# Altium PCB Power Sense Module PCB.PcbDoc
Units mm, origin at the board's own origin, x right, y up, seen from the top; angles counter-clockwise.
Board outline 45 x 44.5 mm, 2 copper layers (Top Layer, Bottom Layer); 23 components, 16 nets, 78 pads, 9 vias.
Unrouted connection lines stored in the file: 1.
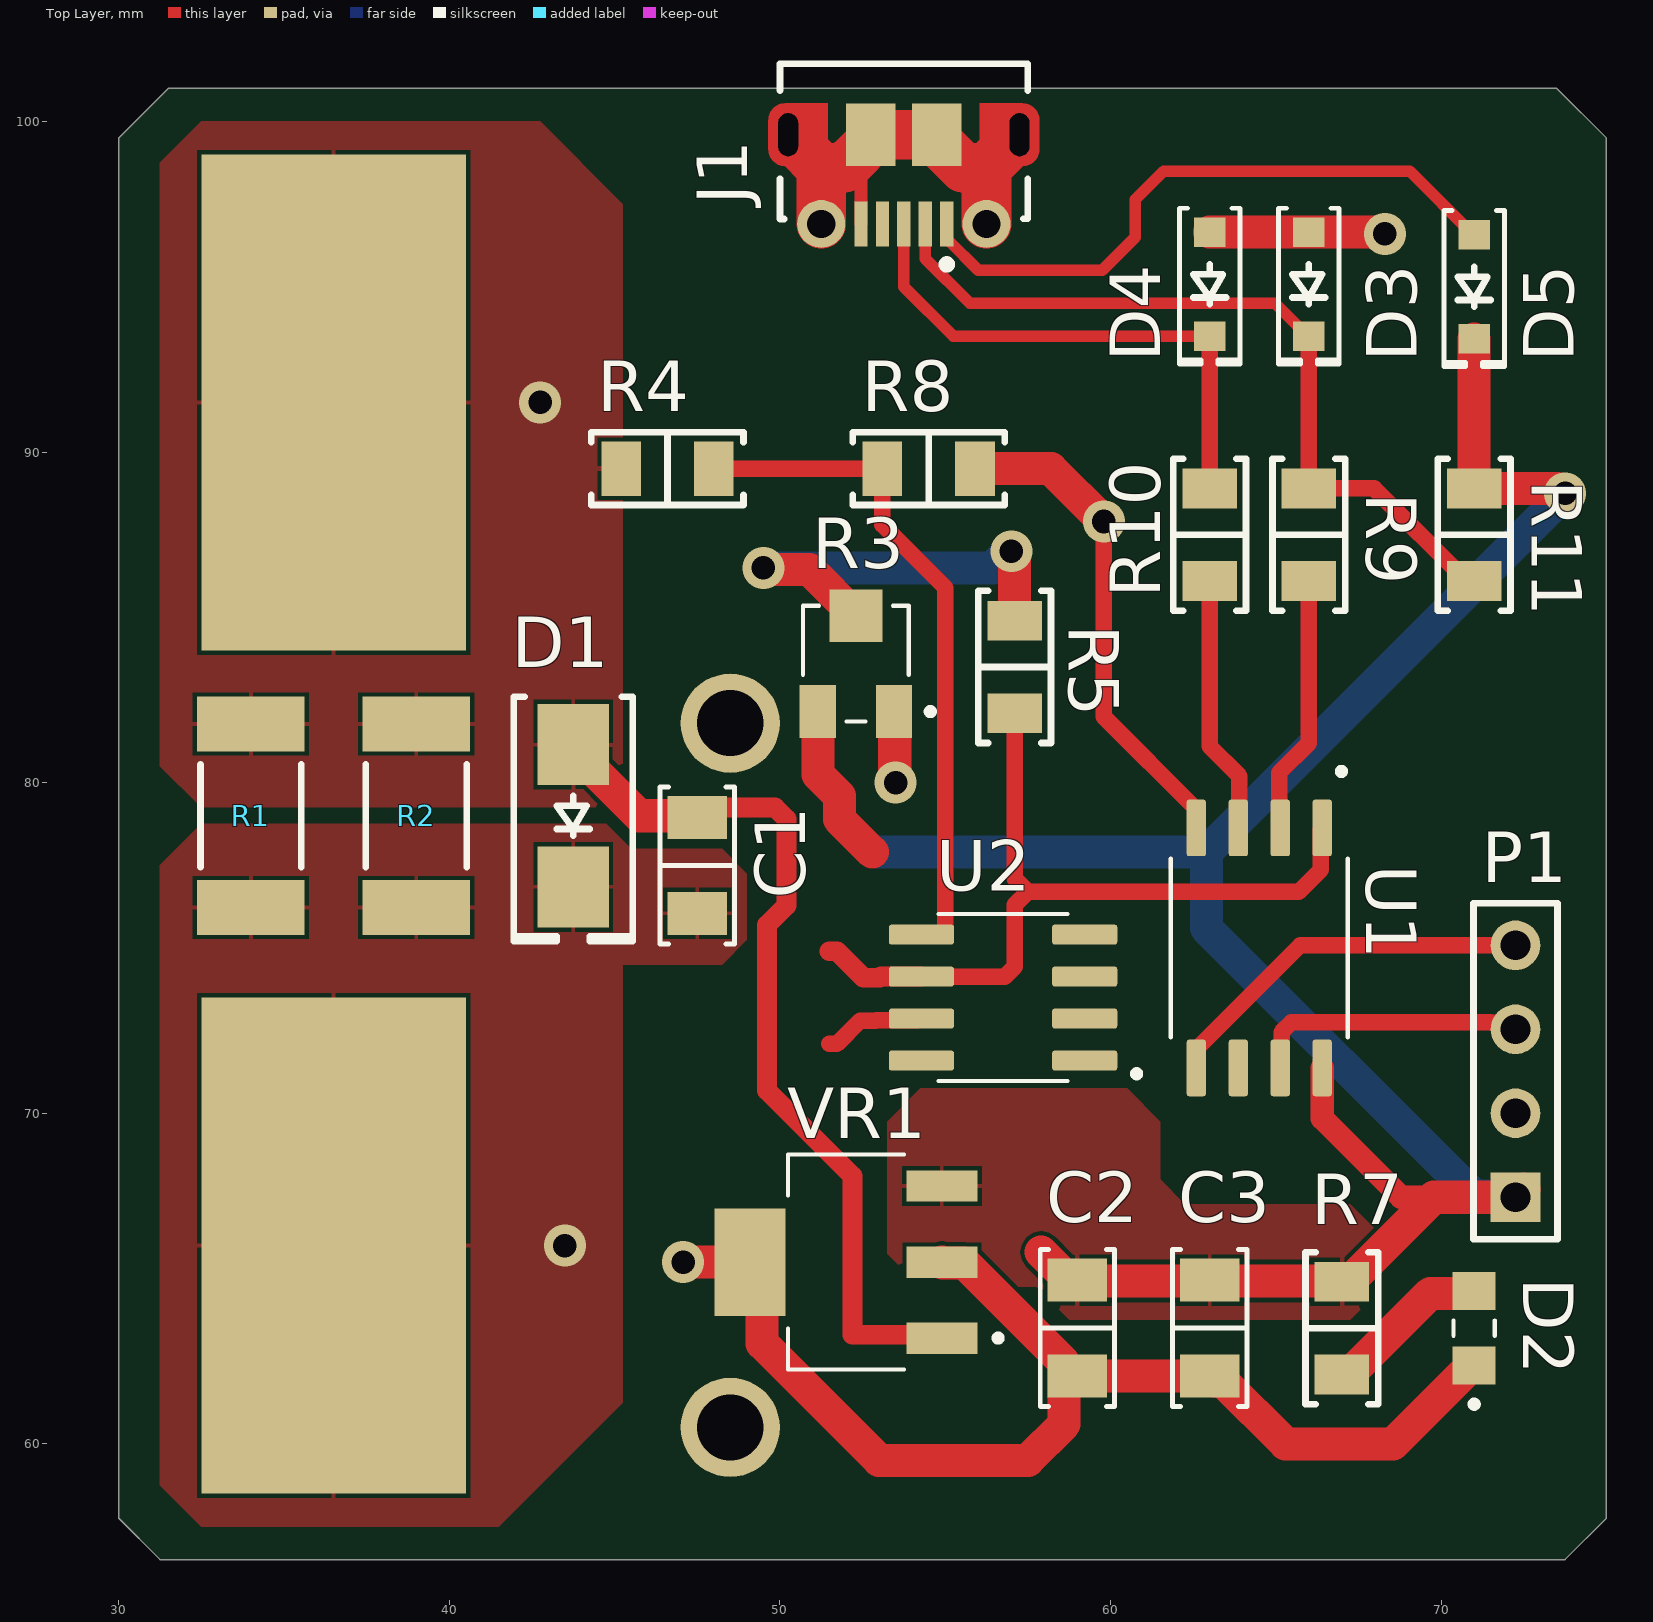
[diagram p0: Top Layer view]
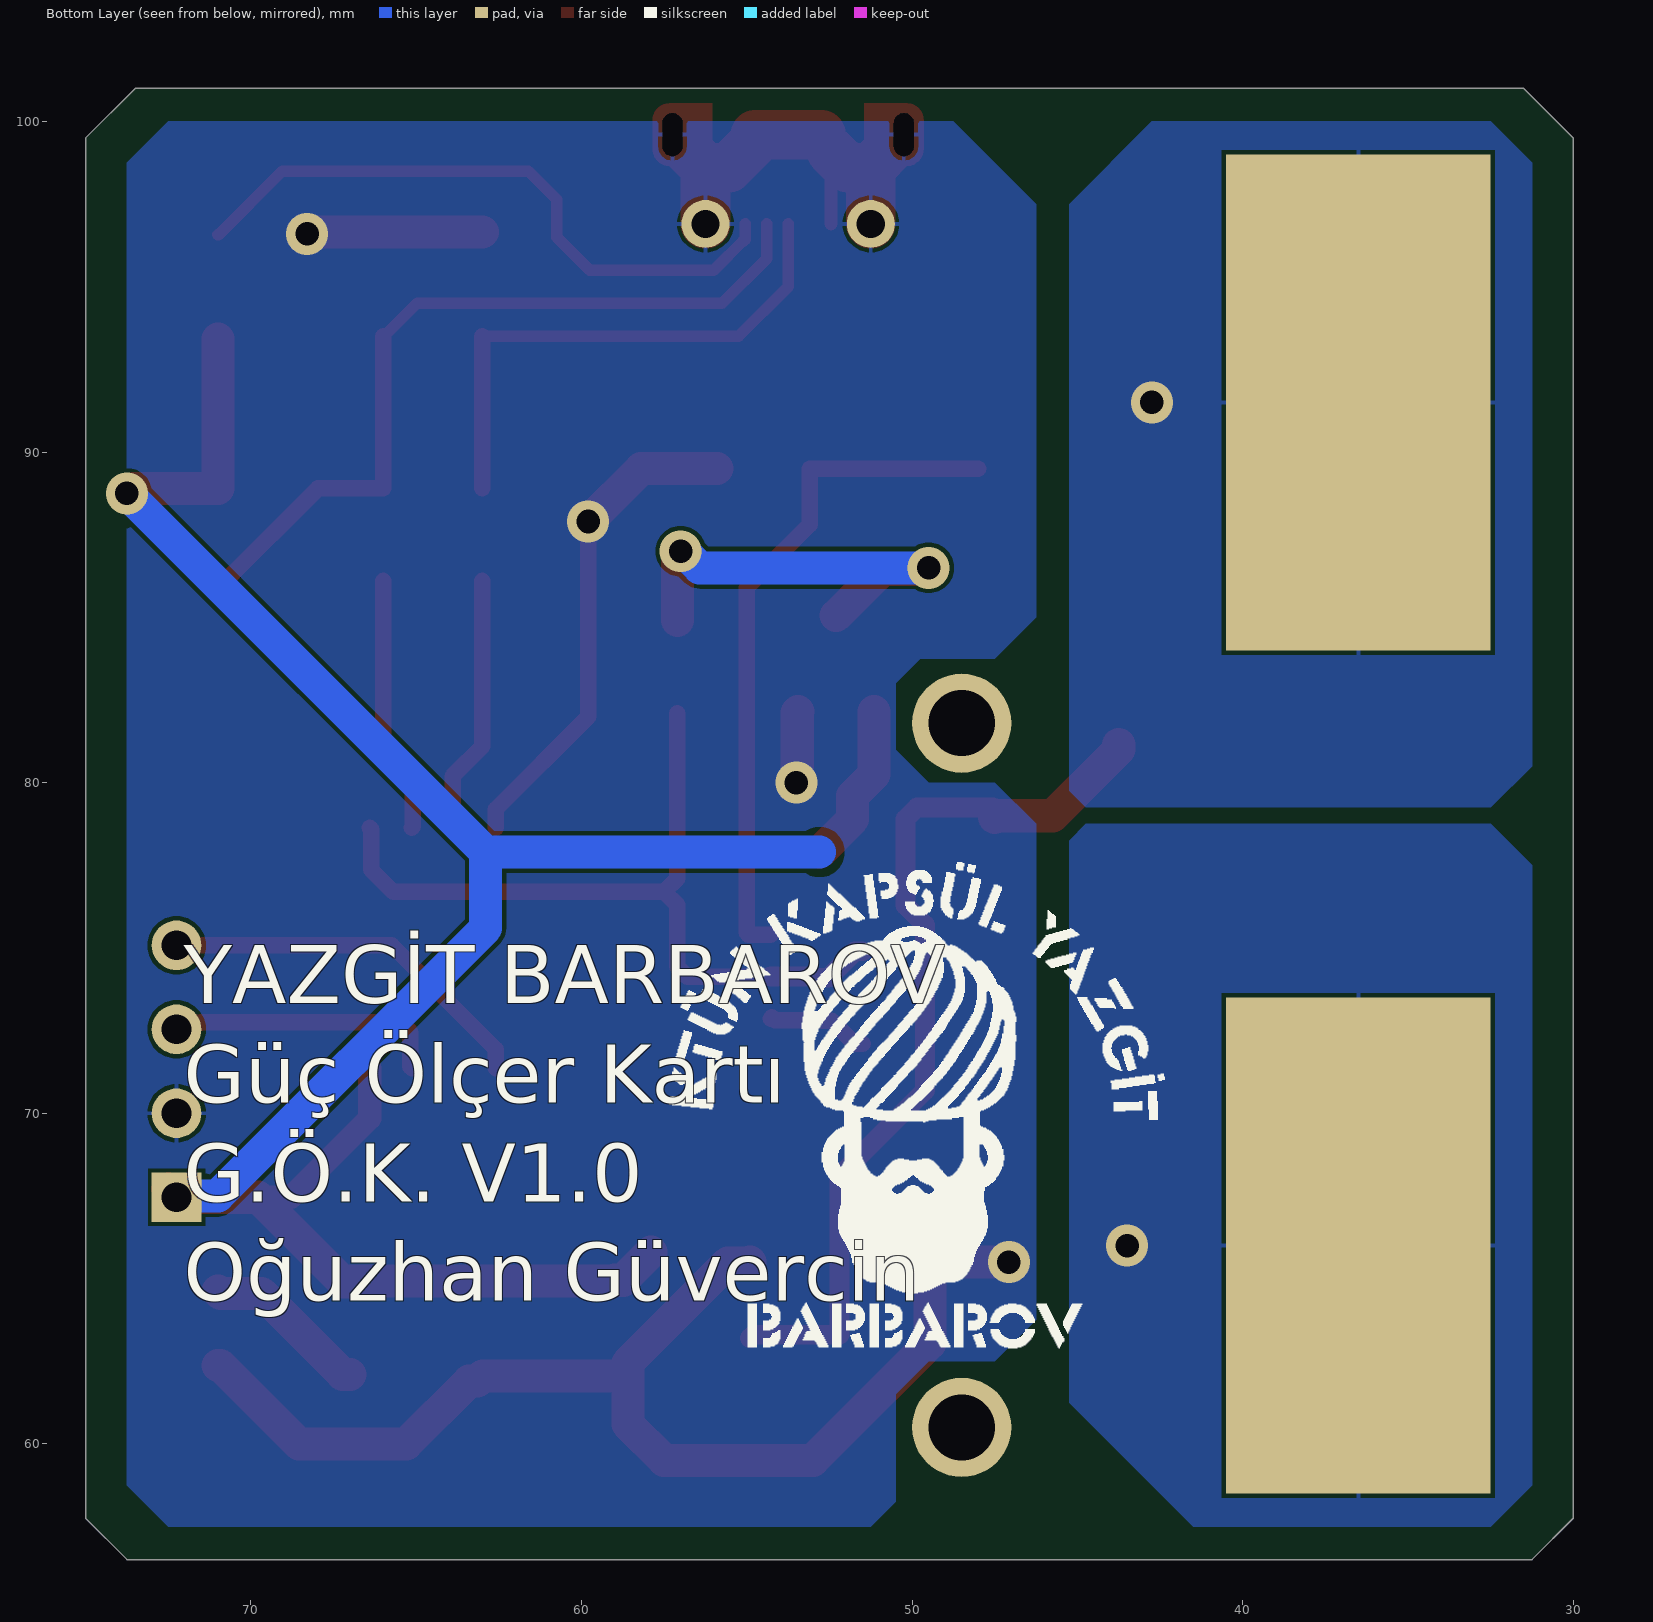
[diagram p1: Bottom Layer view, seen from below]
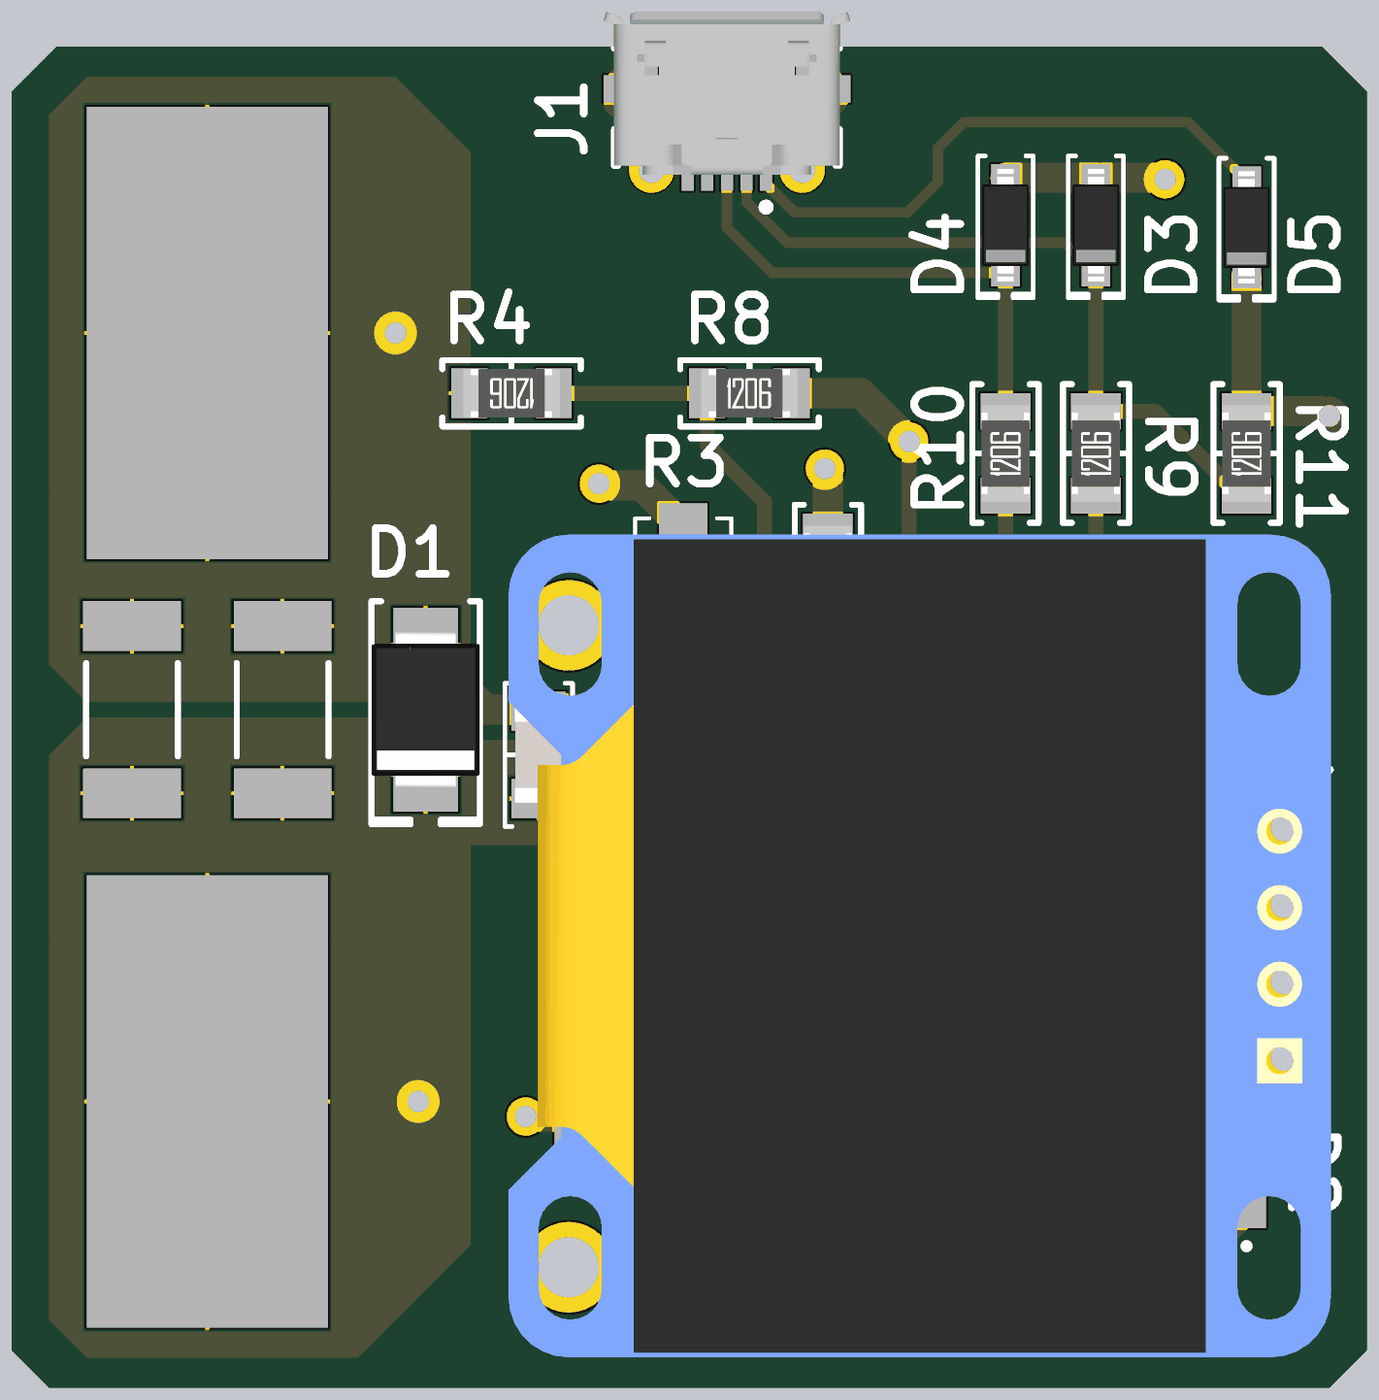
[diagram p2: 3D render of the assembled board from above, using the file's embedded part models]

## Layer stack, top to bottom
Top Solder: solder mask 0.0102, Solder Resist, Dk 3.5
Top Layer: signal copper 0.0356
Dielectric 1: dielectric 0.32, FR-4, Dk 4.8
Bottom Layer: signal copper 0.0356
Bottom Solder: solder mask 0.0102, Solder Resist, Dk 3.5

## Board outline
31.25,56.5 30,57.75 30,99.5 31.5,101 73.5,101 75,99.5 75,57.75 73.75,56.5

## Design rules (kind name [scope] priority, off if disabled: settings)
BoardOutlineClearance [All] p1: gap=0.2 ignorepadtopadclearanceinfootprint=FALSE
Clearance [All] p1: gap=0.127 ignorepadtopadclearanceinfootprint=FALSE except(0.25: Arc-Hole Track-Hole SMDPad-Hole THPad-Hole Via-Hole Fill-Hole Poly-Hole Region-Hole Text-Hole)
ComponentClearance [All] p1: gap=0.127 collisioncheckmode=3 verticalgap=0.127 showdistances=TRUE
DiffPairsRouting [All] p1: maxlimit=0.254 minlimit=0.127 mostfreqgap=0.127 toplayer_minwidth=0.127 toplayer_maxwidth=25.4 toplayer_prefwidth=0.127 bottomlayer_minwidth=0.127 bottomlayer_maxwidth=25.4 bottomlayer_prefwidth=0.127 maxuncoupledlength=12.7
Height [All] p1: minheight=0 maxheight=1816.048 prefheight=12.7
HoleSize [All] p1: absolutevalues=TRUE maxlimit=6.3 minlimit=0.3 maxpercent=80.000 minpercent=20.000
HoleToHoleClearance [All] p1: gap=0.25 allowstackedmicrovias=FALSE
MinimumAnnularRing [All] p1: minimumring=0.076
MinimumSolderMaskSliver [All] p1: minsoldermaskwidth=0
PlaneClearance [All] p1: clearance=0.127
PlaneConnect PlaneConnectPowerPads [InPadClass('PowerPads')] p1: planeconnectstyle=Direct reliefexpansion=0.508 reliefentries=4 reliefconductorwidth=0.254 reliefairgap=0.254
PlaneConnect [All] p2: pad.planeconnectstyle=Relief pad.reliefexpansion=0.3 pad.reliefentries=4 pad.reliefconductorwidth=0.127 pad.reliefairgap=0.127 via.planeconnectstyle=Direct via.reliefexpansion=0.3 via.reliefentries=4 via.reliefconductorwidth=0.127 via.reliefairgap=0.127
PolygonConnect PolygonConnectPowerPads [All vs (InPadClass('PowerPads'))] p1: connectstyle=Direct reliefconductorwidth=0.254 reliefentries=4 polygonreliefangle="90 Angle" airgapwidth=0.254
PolygonConnect [All] p2: thpad.connectstyle=Relief thpad.reliefconductorwidth=0.127 thpad.reliefentries=4 thpad.polygonreliefangle="90 Angle" thpad.airgapwidth=0.127 smdpad.connectstyle=Relief smdpad.reliefconductorwidth=0.127 smdpad.reliefentries=4 smdpad.polygonreliefangle="90 Angle" smdpad.airgapwidth=0.127 via.connectstyle=Direct via.reliefconductorwidth=0.127 via.reliefentries=4 via.polygonreliefangle="90 Angle" via.airgapwidth=0.127
RoutingVias [All] p1: holewidth=0.3 width=0.6 viastyle="Through Hole" minholewidth=0.3 minwidth=0.6 maxholewidth=0.6 maxwidth=6.6
SilkToSilkClearance [All] p1: silktosilkclearance=0
SilkToSolderMaskClearance [IsPad] p1: minsilkscreentomaskgap=0.127 clearancetoexposedcopper=TRUE
SolderMaskExpansion [All] p1: expansion=0.075 istentingtop=FALSE
Width [All] p1: maxlimit=25.4 minlimit=0.127 preferedwidth=0.127 minimp=50.000000 maximp=50.000000 favimp=50.000000
20 further rules are at their usual default settings.

## Components (designator, comment, footprint, x,y, rotation, side; value= is the part's Value field where it differs from the comment)
C1 "1µF" "CAP 1206_3216 - 0.8MM" 47.5,77.5 r90 top
C2 "4.7µF" "CAP 1206_3216 - 1.0MM" 59,63.5 r90 top
C3 "0.1µF" "CAP 1206_3216 - 0.8MM" 63,63.5 r90 top
D1 "RS1AB-13-F" "DO214AA SMB" 43.75,79 r270 top
D2 "7012X1" LED_7012X1 71,63.5 r90 top
D3 "BZT52C36-E3-18" SOD-123 66,95.075 r270 top
D4 "BZT52C36-E3-18" SOD-123 63,95.075 r270 top
D5 "1N5819HW-7-F" SOD-123 71,95 r270 top
J1 "105017-0001" USB-MICRO-B_V 53.75,98.25 r180 top
P1 "OLED I2C" "OLED I2C" 72.25,67.46 r90 top locked
R1 "Shunt Resistor" RESC6430X04N 34,79 r90 top
R2 "Shunt Resistor" RESC6430X04N 39,79 r90 top
R3 "3313J-1-202G" TRIM_3313J-1-202G 52.3,83.6 r0 top
R4 "10 kOhms" "RES 1206_3216" 46.6,89.5 r180 top
R5 "10 kOhms" "RES 1206_3216" 57.1,83.5 r270 top
R7 "1 kOhms" "RES 1206_3216" 67,63.5 r90 top
R8 "100 kOhms" "RES 1206_3216" 54.5,89.5 r0 top
R9 "66.5 Ohms" "RES 1206_3216" 66,87.5 r90 top
R10 "66.5 Ohms" "RES 1206_3216" 63,87.5 r90 top
R11 "1.5 kOhms" "RES 1206_3216" 71,87.5 r90 top
U1 "ATTINY85V-10SU" SOIC127P798X216-8N 64.5,75 r270 top
U2 "LM358D" SOIC127P599X175-8N 56.75,73.5 r180 top
VR1 "LM7805MPX/NOPB" VREG_LM7805MPX/NOPB 52,65.5 r180 top

## Footprints (in the part's own frame and the unit in brackets; to place one, negate y for a bottom-side part, rotate by r counter-clockwise, add the part's x,y. Pads: shape width x height; smd on the part's side, far side on the other; paste and mask are expansions set on the pad)
"CAP 1206_3216 - 0.8MM" [mm] "Chip Capacitor, 2-Leads, Body 3.25x1.60mm, IPC Medium Density"
  rect 1.3x1.8 smd: 1(-1.45,0) 2(1.45,0)
  silkscreen extent -2.37,-1.12 2.37,1.12, body extent -1.6,-0.8 1.6,0.8, height 0.8
"CAP 1206_3216 - 1.0MM" [mm] "Chip Capacitor, 2-Leads, Body 3.25x1.60mm, IPC Medium Density"
  rect 1.3x1.8 smd: 1(-1.45,0) 2(1.45,0)
  silkscreen extent -2.37,-1.12 2.37,1.12, body extent -1.6,-0.8 1.6,0.8, height 1
"DO214AA SMB" [mm] "Molded Diode, 2-Leads, Body 4.31x3.62mm, IPC Medium Density"
  rect 2.45x2.15 smd: 1(-2.15,0) 2(2.15,0)
  silkscreen extent -3.6,-1.8 3.8,1.8, body extent -2.6,-1.8 2.6,1.8, height 2.4
LED_7012X1 [mm]
  rect 1.15x1.3 smd: A(1.125,0) C(-1.125,0)
  silkscreen extent -2.4,-0.63 0.23,0.63
"OLED I2C" [mm] "Connector; Header; 4 Position"
  rect 1.5x1.5 hole 0.9: 1(0,0)
  round 1.5 hole 0.9: 2(2.54,0) 3(5.08,0) 4(7.62,0)
  silkscreen extent -1.27,-1.27 8.89,1.27, body extent -9.95,-1.55 17.35,25.75, height 8.99
"RES 1206_3216" [mm] "Chip Resistor, 2-Leads, Body 3.13x1.55mm, IPC Medium Density"
  rect 1.2x1.65 smd: 1(-1.4,0) 2(1.4,0)
  silkscreen extent -2.3,-1.1 2.3,1.1, body extent -1.6,-0.8 1.6,0.8, height 0.6
RESC6430X04N [mm] "Chip Resistor, 2-Leads, Body 6,35x3,05mm, IPC Medium Density"
  rect 1.65x3.25 smd: 1(-2.775,0) 2(2.775,0)
  silkscreen extent -1.55,-1.52 1.55,1.53, body extent -3.25,-1.63 3.25,1.63, height 0.38
SOD-123 [mm] "SOD, 2-Leads, Body 1.55x3.70mm, IPC Medium Density"
  rect 0.9x0.95 smd: 1(-1.575,0) 2(1.575,0)
  silkscreen extent -2.3,-0.92 2.41,0.92, body extent -1.86,-0.78 1.86,0.77, height 1.35
SOIC127P599X175-8N [mm]
  rrect25% 1.97x0.6 smd: 1(-2.47,1.905) 2(-2.47,0.635) 3(-2.47,-0.635) 4(-2.47,-1.905) 5(2.47,-1.905) 6(2.47,-0.635) 7(2.47,0.635) 8(2.47,1.905)
  silkscreen extent -4.14,-2.52 1.95,2.52
SOIC127P798X216-8N [mm]
  rrect25% 1.71x0.58 smd: 1(-3.63,1.905) 2(-3.63,0.635) 3(-3.63,-0.635) 4(-3.63,-1.905) 5(3.63,-1.905) 6(3.63,-0.635) 7(3.63,0.635) 8(3.63,1.905)
  silkscreen extent -5.44,-2.68 2.7,2.68
TRIM_3313J-1-202G [mm]
  rect 1.1x1.6 smd: 1(1.15,-1.45) 3(-1.15,-1.45)
  rect 1.6x1.6 smd: 2(0,1.45)
  silkscreen extent -1.6,-1.75 2.35,1.75
USB-MICRO-B_V [mm] "USB, MICRO B, Body 7.491x4.695 mm, Pitch 0.65 mm"
  rect 0.4x1.35 smd: 1(-1.3,1.35) 2(-0.65,1.35) 3(0,1.35) 4(0.65,1.35) 5(1.3,1.35)
  round 1.45 hole 0.85: 6(-2.5,1.35) 7(2.5,1.35)
  rrect50% 0x0 hole 0.6 slot 1.3 at 90 deg: 8(-3.5,-1.35) 11(3.5,-1.35)
  rect 1.5x1.9 smd: 9(-1,-1.35) 10(1,-1.35)
  Top Layer circle w0.5: c-3.6,-1.8 r0.25
  Top Layer circle w0.5: c-3.6,-0.9 r0.25
  Top Layer circle w0.5: c3.6,-1.8 r0.25
  Top Layer region: -3.6,-1.8 -3.6,-0.9 -4.1,-0.9 -4.1,-1.8
  Top Layer region: 3.6,-0.9 3.6,-1.8 4.1,-1.8 4.1,-0.9
  Top Layer region: 2.3,-0.4 2.3,-2.3 3.6,-2.3 3.6,-0.4
  Top Layer region: -2.3,-2.3 -2.3,-0.4 -3.6,-0.4 -3.6,-2.3
  Top Layer lines w0.5: 3.5,-0.671 ccw(c3.6,-0.9) 3.35,-0.9 ccw(c3.6,-0.9) 3.5,-1.129 ccw(c3.6,-0.9) 3.5,-0.671
  silkscreen extent -3.75,-3.5 3.75,2.7, body extent -4.1,-3.9 4.1,1.5, height 2.67
VREG_LM7805MPX/NOPB [mm]
  rect 2.15x0.95 smd: 1(-2.9,2.3) 2(-2.9,0) 3(-2.9,-2.3)
  rect 2.15x3.25 smd: 4(2.9,0)
  silkscreen extent -4.7,-3.25 1.75,3.25, body extent -3.63,-3.25 3.37,3.25, height 1.71

## Part data
C1: library part AC1206KKX7R8BB105, "CAP CER 1UF 25V X7R 1206", Device Package="1206 (3216 Metric)", Manufacturer=Yageo, Operating Temperature="-55°C ~ 125°C", Ratings=AEC-Q200, Supplier Part Number 1=311-3039-1-ND, Temperature Coefficient=X7R, Tolerance=±10%, Voltage - Rated=25V, Applications=Automotive, Capacitance=1µF, ComponentLink1Description=Datasheet, ComponentLink1URL=http://www.yageo.com/documents/recent/UPY-AC_NP0X7R_16V-to-630V_12.pdf, ComponentLink2Description="DigiKey Link", ComponentLink2URL=http://digikey.com/product-detail/en/yageo/AC1206KKX7R8BB105/311-3039-1-ND/6643290, LastUpdated="2.09.2020 01:04:45", Lifecycle Status=Active, Minimum Order=1, Mounting Type="Surface Mount, MLCC", Package / Case="1206 (3216 Metric)", Packaging=TapeAndReel, Part Number=AC1206KKX7R8BB105, Part Status=Active, PartId=18820, Price=0.22, Series=AC, Size / Dimension="0.126\" L x 0.063\" W (3.20mm x 1.60mm)", Supplier 1=DigiKey, Thickness (Max)="0.028\" (0.70mm)"
C2: library part UMK316ABJ475KD-T, "CAP CER 4.7UF 50V X5R 1206", Device Package="1206 (3216 Metric)", Manufacturer="Taiyo Yuden", Operating Temperature="-55°C ~ 85°C", Supplier Part Number 1=587-2988-1-ND, Temperature Coefficient=X5R, Tolerance=±10%, Voltage - Rated=50V, Applications="General Purpose", Capacitance=4.7µF, ComponentLink1Description=Datasheet, ComponentLink1URL=https://www.yuden.co.jp/productdata/catalog/mlcc01_e.pdf, ComponentLink2Description="DigiKey Link", ComponentLink2URL=http://digikey.com/product-detail/en/taiyo-yuden/UMK316ABJ475KD-T/587-2988-1-ND/2714181, LastUpdated="2.09.2020 01:05:06", Lifecycle Status=Active, Minimum Order=1, Mounting Type="Surface Mount, MLCC", Package / Case="1206 (3216 Metric)", Packaging=TapeAndReel, Part Number=UMK316ABJ475KD-T, Part Status=Active, PartId=18934, Price=0.12, Series=M, Size / Dimension="0.126\" L x 0.063\" W (3.20mm x 1.60mm)", Supplier 1=DigiKey, Thickness (Max)="0.037\" (0.95mm)"
C3: library part CC1206MRY5V9BB104, "CAP CER 0.1UF 50V Y5V 1206", Device Package="1206 (3216 Metric)", Manufacturer=Yageo, Operating Temperature="-30°C ~ 85°C", Supplier Part Number 1=311-4504-1-ND, Temperature Coefficient="Y5V (F)", Tolerance=±20%, Voltage - Rated=50V, Applications="General Purpose", Capacitance=0.1µF, ComponentLink1Description=Datasheet, ComponentLink1URL=http://www.yageo.com/documents/recent/UPY-GPHC_Y5V_6.3V-to-50V_8.pdf, ComponentLink2Description="DigiKey Link", ComponentLink2URL=http://digikey.com/product-detail/en/yageo/CC1206MRY5V9BB104/311-4504-1-ND/8025593, LastUpdated="2.09.2020 01:04:46", Lifecycle Status=Active, Minimum Order=1, Mounting Type="Surface Mount, MLCC", Package / Case="1206 (3216 Metric)", Packaging=TapeAndReel, Part Number=CC1206MRY5V9BB104, Part Status=Active, PartId=18711, Price=0.06, Series=CC, Size / Dimension="0.126\" L x 0.063\" W (3.20mm x 1.60mm)", Supplier 1=DigiKey, Thickness (Max)="0.028\" (0.70mm)"
D1: "DIODE GEN PURP 50V 1A SMB", Capacitance @ Vr, F="15pF @ 4V, 1MHz", Current - Average Rectified (Io)=1A, Current - Reverse Leakage @ Vr="5µA @ 50V", Manufacturer="Diodes Incorporated", Operating Temperature - Junction="-65°C ~ 150°C", Package / Case="DO-214AA, SMB", Supplier Device Package=SMB, Supplier Part Number 1=RS1AB-FDICT-ND, Voltage - DC Reverse (Vr) (Max)=50V, Voltage - Forward (Vf) (Max) @ If="1.3V @ 1A", ComponentLink1Description=Datasheet, ComponentLink1URL=https://www.diodes.com/assets/Datasheets/ds15002.pdf, ComponentLink2Description="DigiKey Link", ComponentLink2URL=http://digikey.com/product-detail/en/diodes-incorporated/RS1AB-13-F/RS1AB-FDICT-ND/815907, Diode Type=Standard, LastUpdated="2.09.2020 01:18:53", Lifecycle Status=Active, Minimum Order=1, Mounting Type="Surface Mount", Packaging=TapeAndReel, Part Number=RS1AB-13-F, Part Status=Active, PartId=27, Price=0.09, Reverse Recovery Time (trr)=150ns, Series=-, Speed="Fast Recovery =< 500ns, > 200mA (Io)", Supplier 1=DigiKey
D2: "Red LED Indication - Discrete 1.7V 0805 (2012 Metric)", Package=None, Availability=Unavailable, MP=7012X1, Price=None
D3 D4: "DIODE ZENER 36V 410MW SOD123", Current - Reverse Leakage @ Vr="100nA @ 27V", Manufacturer="Vishay Semiconductor Diodes Division", Operating Temperature="-55°C ~ 150°C", Package / Case=SOD-123, Power - Max=410mW, Supplier Part Number 1=BZT52C36-E3-18GICT-ND, Tolerance=±5%, Voltage - Zener (Nom) (Vz)=36V, ComponentLink1Description=Datasheet, ComponentLink1URL=http://www.vishay.com/docs/85760/bzt52.pdf, ComponentLink2Description="DigiKey Link", ComponentLink2URL=http://digikey.com/product-detail/en/vishay-semiconductor-diodes-division/BZT52C36-E3-18/BZT52C36-E3-18GICT-ND/9600530, LastUpdated="2.09.2020 01:19:26", Lifecycle Status=Active, Minimum Order=1, Mounting Type="Surface Mount", Packaging=TapeAndReel, Part Number=BZT52C36-E3-18, Part Status=Active, PartId=1960, Price=0.03, Series=-, Supplier 1=DigiKey, Supplier Device Package=SOD-123, Impedance (Max) (Zzt)="40 Ohms"
D5: "DIODE SCHOTTKY 40V 1A SOD123", Capacitance @ Vr, F="60pF @ 4V, 1MHz", Current - Average Rectified (Io)=1A, Current - Reverse Leakage @ Vr="1mA @ 40V", Manufacturer="Diodes Incorporated", Operating Temperature - Junction="-65°C ~ 125°C", Package / Case=SOD-123, Supplier Part Number 1=1N5819HW-FDICT-ND, Voltage - DC Reverse (Vr) (Max)=40V, Voltage - Forward (Vf) (Max) @ If="450mV @ 1A", ComponentLink1Description=Datasheet, ComponentLink1URL=https://www.diodes.com/assets/Datasheets/ds30217.pdf, ComponentLink2Description="DigiKey Link", ComponentLink2URL=http://digikey.com/product-detail/en/diodes-incorporated/1N5819HW-7-F/1N5819HW-FDICT-ND/815283, Diode Type=Schottky, LastUpdated="2.09.2020 01:19:08", Lifecycle Status=Active, Minimum Order=1, Mounting Type="Surface Mount", Packaging=TapeAndReel, Part Number=1N5819HW-7-F, Part Status=Active, PartId=2212, Price=0.08, Series=-, Speed="Fast Recovery =< 500ns, > 200mA (Io)", Supplier 1=DigiKey, Supplier Device Package=SOD-123
J1: library part CMP-2000-05827-1, "Micro-USB B Receptacle, Right Angle, Bottom Mount, Surface Mount, with Solder Tabs, -30 to 85 degC, 5-Pin USB, RoHS, Tape and Reel", Manufacturer=Molex, Package Description="5-Leads USB, Micro B, Body 7.5 x 5 mm, Pitch 0.65 mm", Package Reference=MICRO-B, Package Version="Rev. F, 12/2012", Standard Package=1, Voltage - Max=30V, 3D Model=105017-0001.stp, Catalog Drawings=1050170001, Category=Connectors,Interconnects, Circuits=5, Connector Type=USB-microB, Datasheet URL=http://www.molex.com/elqNow/elqRedir.htm?ref=http://www.molex.com/webdocs/datasheets/pdf/en-us/1050170001_IO_CONNECTORS.pdf, Datasheet Version=03/2016, Family=USB,DVI,HDMIConnectors, Featured Product=Micro-USBConnectorsUSBConnectors, Features=Shielded,SolderRetention, Gender=Receptacle, Manufacturer URL=http://www.molex.com/, Mating Products=WM17145-ND-CABLEMICROUSBBTOSTDA1.0MWM17147-ND-CABLEMICROUSBBTOSTDA2.0MWM17146-ND-CABLEMICROUSBBTOSTDA1.5M, Mounting Technology=SurfaceMount, Mounting Type=BoardCutout,SurfaceMount,RightAngle, Number of Contacts=5, Online Catalog=Molex-MicroUSB, Other Names=WM1399DKR, Package URL=http://www.molex.com/pdm_docs/sd/1050170001_sd.pdf, Packaging=Digi-Reel®, PCN Assembly/Origin=ResinSupplier21/Oct/2015, RoHS Information=1050170001CertofCompliance, Series=-, Specifications=-, Ingress Protection=-
R3: "Trimpot 2.0k Ohm 3mm Sq Cer St", Package=None, Availability=Unavailable, MF=Bourns, MP=3313J-1-202G, Price=None, SnapEDA_Link=https://www.snapeda.com/parts/3313J-1-202G/Bourns/view-part/1480845/?ref=snap
R4 R5: library part CR1206AFX-1002EAS, "RESA-AS 1206 10K 1% 250MW TC100", Device Package="1206 (3216 Metric)", Manufacturer="Bourns Inc.", Operating Temperature="-55°C ~ 155°C", Power (Watts)="0.25W, 1/4W", Ratings=AEC-Q200, Supplier Device Package=1206, Supplier Part Number 1=CR1206AFX-1002EASCT-ND, Temperature Coefficient=±100ppm/°C, Tolerance=±1%, ComponentLink1Description=Datasheet, ComponentLink1URL=//media.digikey.com/pdf/Data%20Sheets/Bourns%20PDFs/CRyyyyA-AS_Model_DS.pdf, ComponentLink2Description="DigiKey Link", ComponentLink2URL=http://digikey.com/product-detail/en/bourns-inc/CR1206AFX-1002EAS/CR1206AFX-1002EASCT-ND/10240189, Composition="Thick Film", Features="Anti-Sulfur, Automotive AEC-Q200, Moisture Resistant", Height - Seated (Max)="0.026\" (0.65mm)", LastUpdated="2.09.2020 01:13:10", Lifecycle Status=Active, Minimum Order=1, Number of Terminations=2, Package / Case="1206 (3216 Metric)", Packaging=TapeAndReel, Part Number=CR1206AFX-1002EAS, Part Status=Active, PartId=26960, Price=0.01, Resistance="10 kOhms", Series=CR1206A-AS, Size / Dimension="0.122\" L x 0.061\" W (3.10mm x 1.55mm)", Supplier 1=DigiKey
R7: library part RNCS1206BKE1K00, "RES 1K OHM 0.1% 1/8W 1206", Device Package="1206 (3216 Metric)", Manufacturer="Stackpole Electronics Inc", Operating Temperature="-55°C ~ 155°C", Power (Watts)="0.125W, 1/8W", Ratings=AEC-Q200, Supplier Device Package=1206, Supplier Part Number 1=RNCS1206BKE1K00CT-ND, Temperature Coefficient=±25ppm/°C, Tolerance=±0.1%, ComponentLink1Description=Datasheet, ComponentLink1URL=https://www.seielect.com/catalog/sei-rncs_rnch.pdf, ComponentLink2Description="DigiKey Link", ComponentLink2URL=http://digikey.com/product-detail/en/stackpole-electronics-inc/RNCS1206BKE1K00/RNCS1206BKE1K00CT-ND/1800334, Composition="Thin Film", Features="Anti-Corrosive, Automotive AEC-Q200, Moisture Resistant", Height - Seated (Max)="0.026\" (0.65mm)", LastUpdated="2.09.2020 01:13:11", Lifecycle Status=Active, Minimum Order=1, Number of Terminations=2, Package / Case="1206 (3216 Metric)", Packaging=TapeAndReel, Part Number=RNCS1206BKE1K00, Part Status=Active, PartId=26856, Price=0.10, Resistance="1 kOhms", Series=RNCS, Size / Dimension="0.120\" L x 0.061\" W (3.05mm x 1.55mm)", Supplier 1=DigiKey
R8: library part RT1206BRB07100KL, "RES SMD 100K OHM 0.1% 1/4W 1206", Device Package="1206 (3216 Metric)", Manufacturer=Yageo, Operating Temperature="-55°C ~ 155°C", Power (Watts)="0.25W, 1/4W", Supplier Device Package=1206, Supplier Part Number 1=YAG5016CT-ND, Temperature Coefficient=±10ppm/°C, Tolerance=±0.1%, ComponentLink1Description=Datasheet, ComponentLink1URL=https://www.yageo.com/upload/media/product/productsearch/datasheet/rchip/PYu-RT_1-to-0.01_RoHS_L_11.pdf, ComponentLink2Description="DigiKey Link", ComponentLink2URL=http://digikey.com/product-detail/en/yageo/RT1206BRB07100KL/YAG5016CT-ND/6617172, Composition="Thin Film", Height - Seated (Max)="0.026\" (0.65mm)", LastUpdated="2.09.2020 01:13:11", Lifecycle Status=Active, Minimum Order=1, Number of Terminations=2, Package / Case="1206 (3216 Metric)", Packaging=TapeAndReel, Part Number=RT1206BRB07100KL, Part Status=Active, PartId=26928, Price=0.22, Resistance="100 kOhms", Series=RT, Size / Dimension="0.122\" L x 0.063\" W (3.10mm x 1.60mm)", Supplier 1=DigiKey
R9 R10: library part RK73H2BTTD66R5F, "RES 66.5 OHM 1% 1/4W 1206", Device Package="1206 (3216 Metric)", Manufacturer="KOA Speer Electronics, Inc.", Operating Temperature="-55°C ~ 155°C", Power (Watts)="0.25W, 1/4W", Ratings=AEC-Q200, Supplier Device Package=1206, Supplier Part Number 1=2019-RK73H2BTTD66R5FCT-ND, Temperature Coefficient=±100ppm/°C, Tolerance=±1%, ComponentLink1Description=Datasheet, ComponentLink1URL=http://www.koaspeer.com/catimages/Products/RK73H/RK73H.pdf, ComponentLink2Description="DigiKey Link", ComponentLink2URL=http://digikey.com/product-detail/en/koa-speer-electronics-inc/RK73H2BTTD66R5F/2019-RK73H2BTTD66R5FCT-ND/10237441, Composition="Thick Film", Features="Automotive AEC-Q200, Moisture Resistant", Height - Seated (Max)="0.028\" (0.70mm)", LastUpdated="2.09.2020 01:13:09", Lifecycle Status=Active, Minimum Order=1, Number of Terminations=2, Package / Case="1206 (3216 Metric)", Packaging=TapeAndReel, Part Number=RK73H2BTTD66R5F, Part Status=Active, PartId=27226, Price=0.01, Resistance="66.5 Ohms", Series=RK73H, Size / Dimension="0.126\" L x 0.063\" W (3.20mm x 1.60mm)", Supplier 1=DigiKey
R11: library part RNCP1206FTD1K50, "RES 1.5K OHM 1% 1/2W 1206", Device Package="1206 (3216 Metric)", Manufacturer="Stackpole Electronics Inc", Operating Temperature="-55°C ~ 155°C", Power (Watts)="0.5W, 1/2W", Supplier Device Package=1206, Supplier Part Number 1=RNCP1206FTD1K50CT-ND, Temperature Coefficient=±100ppm/°C, Tolerance=±1%, ComponentLink1Description=Datasheet, ComponentLink1URL=https://www.seielect.com/catalog/sei-rncp.pdf, ComponentLink2Description="DigiKey Link", ComponentLink2URL=http://digikey.com/product-detail/en/stackpole-electronics-inc/RNCP1206FTD1K50/RNCP1206FTD1K50CT-ND/2240679, Composition="Thin Film", Features="Anti-Sulfur, Moisture Resistant", Height - Seated (Max)="0.024\" (0.60mm)", LastUpdated="2.09.2020 01:13:10", Lifecycle Status=Active, Minimum Order=1, Number of Terminations=2, Package / Case="1206 (3216 Metric)", Packaging=TapeAndReel, Part Number=RNCP1206FTD1K50, Part Status=Active, PartId=26971, Price=0.01, Resistance="1.5 kOhms", Series=RNCP, Size / Dimension="0.122\" L x 0.059\" W (3.10mm x 1.50mm)", Supplier 1=DigiKey
U2: "Dual standard operational amplifier 8-SOIC 0 to 70", Package="SOIC-8 Texas Instruments", Arrow_Asia-Purchase-URL=https://snapeda.com/shop?store=Arrow+Asia&id=4793021, Arrow_Electronics-Purchase-URL=https://snapeda.com/shop?store=Arrow+Electronics&id=4793021, Digi-Key_Part_Number=296-1014-2-ND, DigiKey-Purchase-URL=https://snapeda.com/shop?store=DigiKey&id=4793021, MF="Texas Instruments", Mouser-Purchase-URL=https://snapeda.com/shop?store=Mouser&id=4793021, MP=LM358D, SnapEDA_Link=https://www.snapeda.com/parts/LM358D/Texas%20Instruments/view-part/4793021/?ref=snap, Texas_Instruments-Purchase-URL=https://snapeda.com/shop?store=Texas+Instruments&id=4793021
VR1: "1.5-A, 30-V, linear voltage regulator 4-SOT-223 0 to 125", Package="SOT-223-4 Texas Instruments", Availability=Good, DigiKey-Purchase-URL=https://snapeda.com/shop?store=DigiKey&id=546225, MF="Texas Instruments", Mouser-Purchase-URL=https://snapeda.com/shop?store=Mouser&id=546225, MP=LM7805MPX/NOPB, Price=None, SnapEDA_Link=https://www.snapeda.com/parts/LM7805MPX/NOPB/Texas%20Instruments/view-part/546225/?ref=snap, Texas_Instruments-Purchase-URL=https://snapeda.com/shop?store=Texas+Instruments&id=546225
P1: LatestRevisionDate=17-Jul-2002, LatestRevisionNote="Re-released for DXP Platform.", Publisher="Altium Limited"

## Free pads (board coordinates)
  rect 8x15 smd: 9(36.5,91.5) 10(36.5,66)
  rect 8x15 smd far side: 11(36.5,66) 12(36.5,91.5)
  round 3 hole 2: 14(48.5,60.5) 15(48.5,81.8)

## Via types
v1: diameter 1.27, hole 0.711, Top Layer to Bottom Layer, 6 vias
v2: diameter 1.27/1.27 (per signal layer), hole 0.711, Top Layer to Bottom Layer, 2 vias
v3: diameter 1.27, hole 0.711, Top Layer to Bottom Layer, tented both sides, 1 vias

## Nets (pads, with @x,y where several pads share a name; then routed paths per layer and width w, separated by ;. In a path a pad name is that pad's centre, name@x,y a point inside that pad or via, vN(x,y) a via of type N, cw(c..) or ccw(c..) an arc to the next point about the centre after c; other vN are vias at no path point)
+5: C2.2 C3.2 D5.2 P1.1 R3.3 R7.2 R11.2 U1.8 VR1.3 | length 74.8
  Top Layer w0.7: U1.8 66.405,69.845 68.79,67.46 69.785,67.46
  Top Layer w1: R3.3 51.15,80.25 51.8,79.6 51.8,78.9 52.8,77.9 ; 57.9,65.8 58.75,64.95 C2.2 59.025,64.925 63,64.925 66.975,64.925 R7.2 67.225,64.9 69.785,67.46 P1.1 P1.1@72.5,67.71 ; D5.2 R11.2 73.527,88.9 73.677,88.75 v3(73.75,88.75)
  Bottom Layer w1: 52.8,77.9 62.9,77.9 ; P1.1 72.21,67.5 71,67.5 62.9,75.6 62.9,77.9 ; v3(73.75,88.75) 62.9,77.9
GND: C2.1 C3.1 D2.C D3.1 D4.1 J1.5 J1.6 J1.7 J1.8 J1.9 J1.10 J1.11 P1.2 R3.1 R8.2 U1.4 VR1.2 VR1.4 | length 73.6
  Top Layer w0.4: J1.5 52.45,99.1 52.45,99.3 J1.10
  Top Layer w0.5: v1(59.8,87.9) 59.8,81.99 62.595,79.195 U1.4
  Top Layer w1: v1(47.073,65.5) VR1.4 49.461,65.139 49.461,63.039 53,59.5 57.5,59.5 58.6,60.6 C2.1@58.6,62.2 ; R3.1 53.475,82.125 53.475,80.025 v1(53.5,80) ; VR1.2 54.925,65.475 55.575,65.475 58.6,62.45 C2.1@58.6,62.2 ; R8.2 58.2,89.5 v1(59.8,87.9) ; D4.1 D3.1 68.25,96.65 v1(68.3,96.6) ; D2.C 70.925,62.375 68.55,60 65.3,60 63.4,61.9 63.15,61.9 C3.1 C2.1 58.75,62.05 C2.1@58.6,62.2
  Top Layer w1.5: J1.11@50.5,99.75 50.5,99.35 51.25,98.6 ; J1.7 51.25,98.6 ; J1.10@52.45,99.1 51.95,98.6 51.25,98.6 ; J1.10 J1.9 54.75,99.4 55.55,98.6 56.25,98.6 ; J1.6 56.25,98.6 ; J1.8@57.075,99.425 56.25,98.6
NetD2_A: D2.A R7.1 | length 5
  Top Layer w1: R7.1 67.225,62.1 69.675,64.55 70.925,64.55 D2.A
NetD3_2: D3.2 J1.2 R9.2 R11.1 | length 24.4
  Top Layer w0.35: J1.2 54.4,95.85 55.75,94.5 64.975,94.5 65.975,93.5 D3.2
  Top Layer w0.5: D3.2 R9.2 67.975,88.9 70.775,86.1 R11.1
NetD4_2: D4.2 J1.3 R10.2 | length 16.4
  Top Layer w0.35: J1.3 53.75,95 55.25,93.5 D4.2
  Top Layer w0.5: R10.2 D4.2
NetD5_1: D5.1 J1.1 | length 19.5
  Top Layer w0.35: J1.1 55.05,96.425 55.075,96.4 55.1,96.4 56,95.5 59.75,95.5 60.75,96.5 60.75,97.64 61.61,98.5 69.05,98.5 70.975,96.575 D5.1
NetP1_3: P1.3 U1.7 | length 8.4
  Top Layer w0.5: U1.7 65.175,71.41 65.175,72.457 65.468,72.75 71.5,72.75 71.519,72.731 72.059,72.731 P1.3
NetP1_4: P1.4 U1.5 | length 11.5
  Top Layer w0.5: U1.5 62.595,71.935 65.74,75.08 P1.4
NetR3_2: R3.2 R5.1 | length 13.2
  Top Layer w1: v1(49.5,86.5) 49.552,86.448 50.902,86.448 R3.2 ; v1(57,87) 57,86.927 57.1,86.827 R5.1
  Bottom Layer w1: v1(49.5,86.5) 56.427,86.5 56.927,87 v1(57,87)
NetR4_1: R4.1 R8.1 U2.5 | length 20.7
  Top Layer w0.5: R4.1 R8.1 53.1,87.8 55,85.9 55,75.455 54.95,75.405 U2.5
NetR5_2: R5.2 U1.1 U2.6 | length 24.5
  Top Layer w0.5: U2.6 56.807,74.135 57.1,74.428 57.1,76.3 57.5,76.7 ; R5.2 57.1,77.1 57.5,76.7 ; U1.1 66.365,78.59 66.365,77.365 65.7,76.7 57.5,76.7
  Top Layer w0.6: 51.5,74.9 51.725,74.9 52.525,74.1 53.022,74.1 53.057,74.135 U2.6
NetR6_1: U2.7 | length 3.1
  Top Layer w0.5: 51.5,72.1 51.725,72.1 52.425,72.8 52.9,72.8 52.915,72.815 54.16,72.815 54.245,72.9 U2.7
NetR9_1: R9.1 U1.2 | length 7.9
  Top Layer w0.5: U1.2 65.1,78.665 65.1,80.3 66,81.2 R9.1
NetR10_1: R10.1 U1.3 | length 7.9
  Top Layer w0.5: R10.1 63,81.1 63.9,80.2 63.9,78.665 U1.3
VBAT+: C1.2 D1.1 pad.9 pad.12 R1.2 R2.2 R4.2 VR1.1 | length 27.3
  Top Layer w0.6: C1.2@47.5,79.2 47.55,79.25 49.849,79.25 50.2,78.899 50.2,76.281 49.611,75.692 49.611,70.689 52.2,68.1 52.2,63.3 54.8,63.3 VR1.1
  Top Layer w1: D1.1 43.75,81 45.75,79 47.45,79 C1.2
  other v2: 42.75,91.5
VBAT-: C1.1 D1.2 pad.10 pad.11 R1.1 R2.1
  other v2: 43.5,66
pads on no net: J1.4 U1.6 U2.1 U2.2 U2.3 U2.4 U2.8

## Polygon pours and split planes (outlines as drawn)
+5 on Top Layer "+5_L01_P004" (solid, pour order 4): 54.25,64.75 53.25,65.75 53.25,69.75 54.25,70.75 60.5,70.75 61.5,69.75 61.5,68 62.25,67.25 67.25,67.25 68.5,66 68.5,65 67.25,63.75 58.75,63.75 57.75,64.75
VBAT+ on Top Layer "VBAT+_L01_P000" (solid, pour order 0): 31.25,98.75 32.5,100 42.75,100 45.25,97.5 45.25,80.25 45.25,79.25 32.5,79.25 31.25,80.5
VBAT- on Top Layer "VBAT-_L01_P002" (solid, pour order 2): 45.5,78 44.75,78.75 32.5,78.75 31.25,77.5 31.25,77.25 31.25,58.75 32.5,57.5 41.5,57.5 45.25,61.25 45.25,72.25 45.25,74.5 48.25,74.5 49,75.25 49,77.25 48.25,78
GND on Bottom Layer "GND_L02_P014" (solid, pour order 14): 51.25,57.5 50.5,58.25 50.5,61.5 49.5,62.5 47.5,62.5 46.25,63.75 46.25,78.75 47.5,80 49.5,80 50.5,81 50.5,83 49.75,83.75 47.5,83.75 46.25,85 46.25,97.5 48.75,100 72.5,100 73.75,98.75 73.75,58.75 72.5,57.5
VBAT+ on Bottom Layer "VBAT+_L02_P008" (solid, pour order 8): 31.25,80.5 32.5,79.25 44.75,79.25 45.25,79.75 45.25,97.5 42.75,100 32.5,100 31.25,98.75
VBAT- on Bottom Layer "VBAT-_L02_P007" (solid, pour order 7): 31.25,58.75 32.5,57.5 41.5,57.5 45.25,61.25 45.25,78.25 44.75,78.75 32.5,78.75 31.25,77.5

## Silkscreen, mask and mechanical layers (free items; w line width, h text height)
Bottom Overlay:
  drawing of 60 lines, arcs and shapes, not listed
  text "YAZGİT BARBAROV / Güç Ölçer Kartı / G.Ö.K. V1.0 / Oğuzhan Güvercin" at 72.036,63.75 h3
Mechanical 1:
  the board outline again, w0.2